# EAGLE board led_strip_panel (EAGLE 5.06)
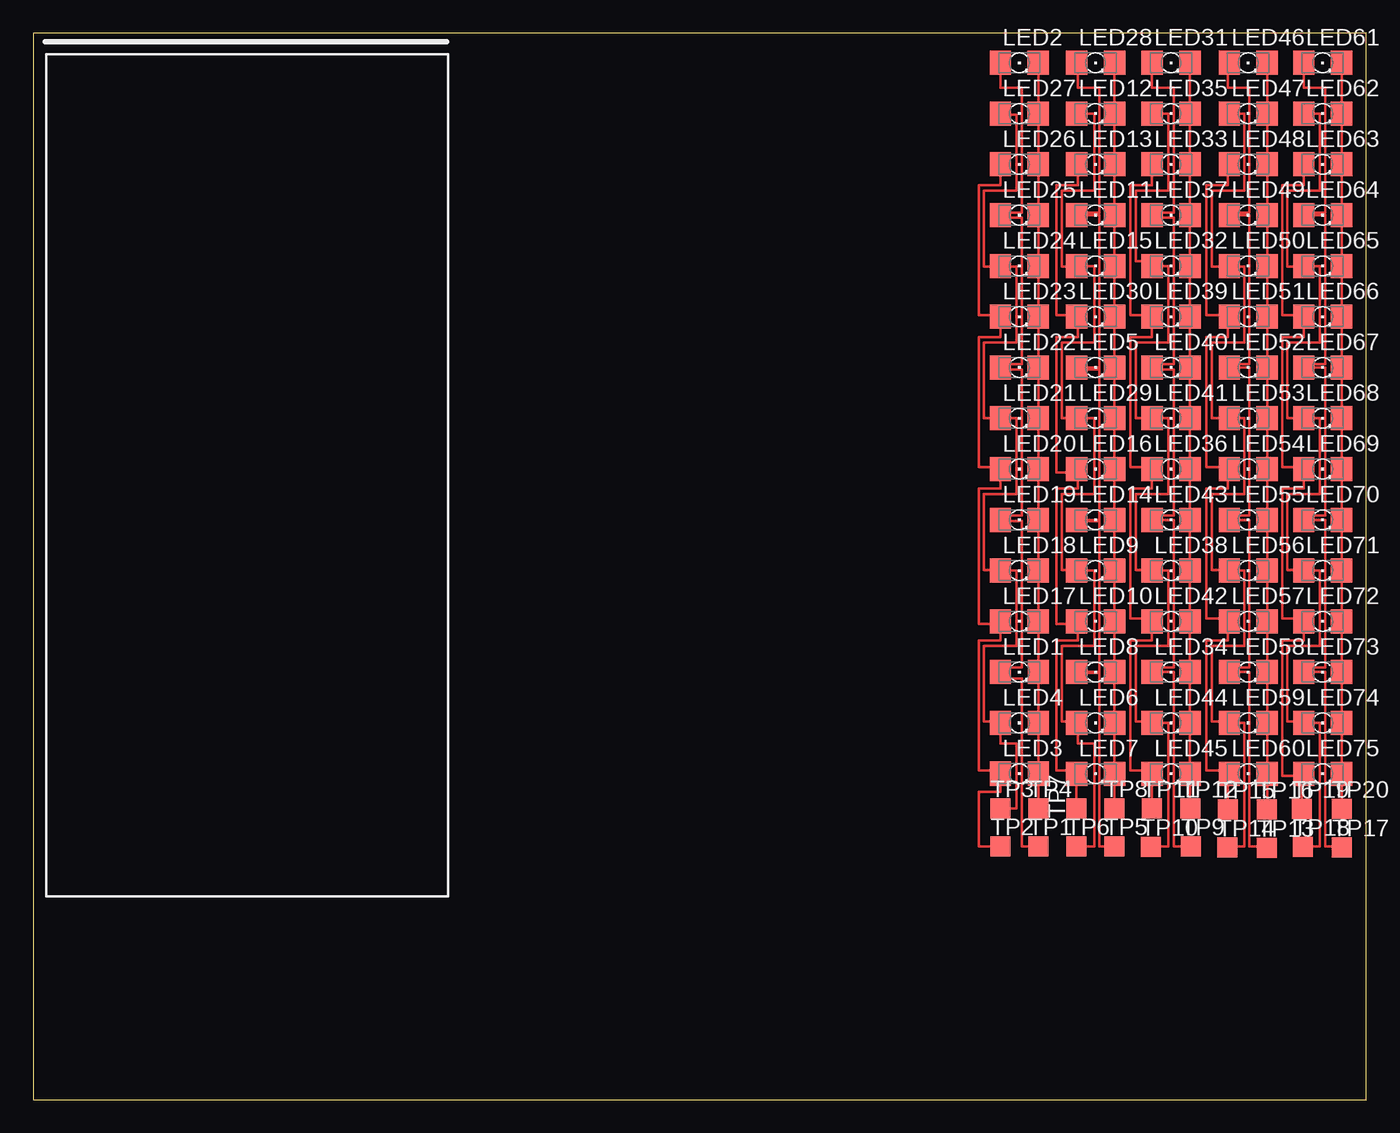
[diagram p0: board, top side]

Size 100 x 80 mm. Coordinates in mm from the lower left corner, seen from the top.
Outline: 0,0 100,0 100,80 0,80 0,0
Copper layers (1*16): Top 0.035mm / dielectric 1.5mm / Bottom 0.035mm
Design rules "default *": minimum track width 8mil, minimum drill 24mil, track to track 8mil, track to pad 8mil, pad to pad 8mil, via to via 8mil, smd to smd 8mil, copper to edge 40mil, drill to drill 8mil, minimum pad ring 10mil, minimum via ring 8mil, stop-mask expansion 4mil, vias tented up to drill 0mil, thermal gap 10mil

## Footprints (pad centres in the part's own frame; a part is rotated, then mirrored left to right if it is on the bottom)
1206 = smd 1.6 x 1.803: A -1.422,0; C 1.422,0
TP15SQ = smd 1.5 x 1.5: TP 0,0

## Placement (x,y rotation side)
LED1  1206  [1206]  73.98,32.07 0 top
LED2  1206  [1206]  73.98,77.79 0 top
LED3  1206  [1206]  73.98,24.45 0 top
LED4  1206  [1206]  73.98,28.26 0 top
LED5  1206  [1206]  79.69,54.93 0 top
LED6  1206  [1206]  79.69,28.26 0 top
LED7  1206  [1206]  79.69,24.45 0 top
LED8  1206  [1206]  79.69,32.07 0 top
LED9  1206  [1206]  79.69,39.69 0 top
LED10  1206  [1206]  79.69,35.88 0 top
LED11  1206  [1206]  79.69,66.36 0 top
LED12  1206  [1206]  79.69,73.98 0 top
LED13  1206  [1206]  79.69,70.17 0 top
LED14  1206  [1206]  79.69,43.5 0 top
LED15  1206  [1206]  79.69,62.55 0 top
LED16  1206  [1206]  79.69,47.31 0 top
LED17  1206  [1206]  73.98,35.88 0 top
LED18  1206  [1206]  73.98,39.69 0 top
LED19  1206  [1206]  73.98,43.5 0 top
LED20  1206  [1206]  73.98,47.31 0 top
LED21  1206  [1206]  73.98,51.12 0 top
LED22  1206  [1206]  73.98,54.93 0 top
LED23  1206  [1206]  73.98,58.74 0 top
LED24  1206  [1206]  73.98,62.55 0 top
LED25  1206  [1206]  73.98,66.36 0 top
LED26  1206  [1206]  73.98,70.17 0 top
LED27  1206  [1206]  73.98,73.98 0 top
LED28  1206  [1206]  79.69,77.79 0 top
LED29  1206  [1206]  79.69,51.12 0 top
LED30  1206  [1206]  79.69,58.74 0 top
LED31  1206  [1206]  85.36,77.79 0 top
LED32  1206  [1206]  85.36,62.55 0 top
LED33  1206  [1206]  85.36,70.17 0 top
LED34  1206  [1206]  85.36,32.07 0 top
LED35  1206  [1206]  85.36,73.98 0 top
LED36  1206  [1206]  85.36,47.31 0 top
LED37  1206  [1206]  85.36,66.36 0 top
LED38  1206  [1206]  85.36,39.69 0 top
LED39  1206  [1206]  85.36,58.74 0 top
LED40  1206  [1206]  85.36,54.93 0 top
LED41  1206  [1206]  85.36,51.12 0 top
LED42  1206  [1206]  85.36,35.88 0 top
LED43  1206  [1206]  85.36,43.5 0 top
LED44  1206  [1206]  85.36,28.26 0 top
LED45  1206  [1206]  85.36,24.45 0 top
LED46  1206  [1206]  91.15,77.79 0 top
LED47  1206  [1206]  91.15,73.98 0 top
LED48  1206  [1206]  91.15,70.17 0 top
LED49  1206  [1206]  91.15,66.36 0 top
LED50  1206  [1206]  91.15,62.55 0 top
LED51  1206  [1206]  91.15,58.74 0 top
LED52  1206  [1206]  91.15,54.93 0 top
LED53  1206  [1206]  91.15,51.12 0 top
LED54  1206  [1206]  91.15,47.31 0 top
LED55  1206  [1206]  91.15,43.5 0 top
LED56  1206  [1206]  91.15,39.69 0 top
LED57  1206  [1206]  91.15,35.88 0 top
LED58  1206  [1206]  91.15,32.07 0 top
LED59  1206  [1206]  91.15,28.26 0 top
LED60  1206  [1206]  91.15,24.45 0 top
LED61  1206  [1206]  96.74,77.79 0 top
LED62  1206  [1206]  96.74,73.98 0 top
LED63  1206  [1206]  96.74,70.17 0 top
LED64  1206  [1206]  96.74,66.36 0 top
LED65  1206  [1206]  96.74,62.55 0 top
LED66  1206  [1206]  96.74,58.74 0 top
LED67  1206  [1206]  96.74,54.93 0 top
LED68  1206  [1206]  96.74,51.12 0 top
LED69  1206  [1206]  96.74,47.31 0 top
LED70  1206  [1206]  96.74,43.5 0 top
LED71  1206  [1206]  96.74,39.69 0 top
LED72  1206  [1206]  96.74,35.88 0 top
LED73  1206  [1206]  96.74,32.07 0 top
LED74  1206  [1206]  96.74,28.26 0 top
LED75  1206  [1206]  96.74,24.45 0 top
TP1  1.1  [TP15SQ]  75.4,19.01 0 top
TP2  1.2  [TP15SQ]  72.56,19.01 0 top
TP3  1.3  [TP15SQ]  72.56,21.86 0 top
TP4  1.4  [TP15SQ]  75.4,21.86 0 top
TP5  2.1  [TP15SQ]  81.09,19.01 0 top
TP6  2.2  [TP15SQ]  78.24,19.01 0 top
TP7  2.3  [TP15SQ]  78.24,21.86 90 top
TP8  2.4  [TP15SQ]  81.09,21.86 0 top
TP9  3.1  [TP15SQ]  86.86,18.99 0 top
TP10  3.2  [TP15SQ]  83.83,18.96 0 top
TP11  3.3  [TP15SQ]  83.91,21.83 0 top
TP12  3.4  [TP15SQ]  86.8,21.83 0 top
TP13  4.1  [TP15SQ]  92.56,18.88 0 top
TP14  4.2  [TP15SQ]  89.59,18.91 0 top
TP15  4.3  [TP15SQ]  89.64,21.76 0 top
TP16  4.4  [TP15SQ]  92.53,21.76 0 top
TP17  4.1  [TP15SQ]  98.18,18.92 0 top
TP18  4.2  [TP15SQ]  95.24,18.96 0 top
TP19  4.3  [TP15SQ]  95.17,21.81 0 top
TP20  4.4  [TP15SQ]  98.16,21.81 0 top

## Library data of the parts
LED1-LED75 = led
TP1-TP20 = testpad

## Nets
LED1.1: LED1.A LED2.A LED19.A LED22.A LED25.A TP1.TP
LED1.2: LED3.A LED17.A LED20.A LED23.A LED26.A TP2.TP
LED1.3: LED4.A LED18.A LED21.A LED24.A LED27.A TP3.TP
LED1.4: LED1.C LED2.C LED3.C LED4.C LED17.C LED18.C LED19.C LED20.C LED21.C LED22.C LED23.C LED24.C LED25.C LED26.C LED27.C TP4.TP
LED2.1: LED5.A LED8.A LED11.A LED14.A LED28.A TP5.TP
LED2.2: LED6.A LED9.A LED12.A LED15.A LED29.A TP6.TP
LED2.3: LED7.A LED10.A LED13.A LED16.A LED30.A TP7.TP
LED2.4: LED5.C LED6.C LED7.C LED8.C LED9.C LED10.C LED11.C LED12.C LED13.C LED14.C LED15.C LED16.C LED28.C LED29.C LED30.C TP8.TP
LED3.1: LED31.A LED34.A LED37.A LED40.A LED43.A TP9.TP
LED3.2: LED32.A LED35.A LED38.A LED41.A LED44.A TP10.TP
LED3.3: LED33.A LED36.A LED39.A LED42.A LED45.A TP11.TP
LED3.4: LED31.C LED32.C LED33.C LED34.C LED35.C LED36.C LED37.C LED38.C LED39.C LED40.C LED41.C LED42.C LED43.C LED44.C LED45.C TP12.TP
LED4.1: LED46.A LED49.A LED52.A LED55.A LED58.A TP13.TP
LED4.2: LED47.A LED50.A LED53.A LED56.A LED59.A TP14.TP
LED4.3: LED48.A LED51.A LED54.A LED57.A LED60.A TP15.TP
LED4.4: LED46.C LED47.C LED48.C LED49.C LED50.C LED51.C LED52.C LED53.C LED54.C LED55.C LED56.C LED57.C LED58.C LED59.C LED60.C TP16.TP
LED5.1: LED61.A LED64.A LED67.A LED70.A LED73.A TP17.TP
LED5.2: LED62.A LED65.A LED68.A LED71.A LED74.A TP18.TP
LED5.3: LED63.A LED66.A LED69.A LED72.A LED75.A TP19.TP
LED5.4: LED61.C LED62.C LED63.C LED64.C LED65.C LED66.C LED67.C LED68.C LED69.C LED70.C LED71.C LED72.C LED73.C LED74.C LED75.C TP20.TP

## Tracks (layer width: path | path; a pad name or v marks a point on that pad's centre or on a via)
LED1.1
  Top 0.203: LED2.A | LED2.A 72.56,75.91 74.18,75.91 74.18,66.56 72.56,66.56 LED25.A | LED25.A | LED25.A 72.56,66.15 74.18,66.15 74.18,55.18 72.56,55.18 LED22.A | LED22.A | LED22.A 72.56,54.77 74.18,54.77 74.18,43.8 72.56,43.8 | 72.56,43.8 LED19.A | 72.56,43.8 72.96,43.8 72.96,43.4 74.18,43.4 74.18,32.42 72.56,32.42 | 72.56,32.42 LED1.A | 72.56,32.42 72.96,32.42 72.96,31.61 74.18,31.61 74.18,19.01 TP1.TP
LED1.2
  Top 0.203: LED26.A | LED26.A 72.56,68.59 70.93,68.59 70.93,58.84 72.56,58.84 LED23.A | LED23.A | LED23.A 72.56,57.21 70.93,57.21 70.93,47.46 72.56,47.46 LED20.A | LED20.A | LED20.A 72.56,45.83 70.93,45.83 70.93,35.67 | 70.93,35.67 72.56,35.67 | 72.56,35.67 LED17.A | 72.56,35.67 70.93,35.67 | 72.56,35.67 72.56,34.45 70.93,34.45 70.93,24.7 | 70.93,24.7 72.56,24.7 LED3.A | 70.93,24.7 72.56,24.7 72.56,23.08 70.93,23.08 70.93,19.01 TP2.TP
LED1.3
  Top 0.203: LED27.A | LED27.A 72.56,73.88 73.77,73.88 73.77,68.19 71.34,68.19 71.34,62.5 72.56,62.5 | 72.56,62.5 | 72.56,62.5 LED24.A | LED24.A | 72.56,62.5 LED24.A | 72.56,62.5 73.77,62.5 73.77,56.81 71.34,56.81 71.34,51.12 LED21.A | LED21.A | LED21.A 73.77,51.12 73.77,45.43 71.34,45.43 71.34,39.74 72.56,39.74 LED18.A 73.77,39.69 73.77,34.05 71.34,34.05 71.34,28.36 | 71.34,28.36 72.56,28.36 LED4.A | 71.34,28.36 72.56,28.36 72.56,26.73 73.77,26.73 73.77,21.86 TP3.TP
LED1.4
  Top 0.203: LED2.C LED27.C LED26.C LED25.C LED24.C LED23.C LED22.C LED21.C LED20.C LED19.C LED18.C LED17.C LED1.C LED4.C LED3.C | LED3.C 75.56,24.45 | TP4.TP LED3.C
LED2.1
  Top 0.203: LED28.A 78.37,77.79 78.37,75.91 80,75.91 80,66.56 78.27,66.56 LED11.A 80,66.36 80,54.77 78.27,54.77 LED5.A 80,54.93 80,43.4 78.27,43.4 LED14.A 80,43.5 80,32.02 78.27,32.02 LED8.A 80,32.07 80,19.01 TP5.TP
LED2.2
  Top 0.203: LED12.A 79.59,73.98 79.59,68.19 77.15,68.19 77.15,62.5 78.27,62.5 LED15.A 79.59,62.55 79.59,56.81 77.15,56.81 77.15,51.12 LED29.A 79.59,51.12 79.59,45.43 77.15,45.43 77.15,39.74 78.27,39.74 LED9.A 79.59,39.69 79.59,34.05 77.15,34.05 77.15,28.36 78.27,28.36 LED6.A 78.37,28.26 78.37,26.73 79.59,26.73 79.59,19.01 TP6.TP
LED2.3
  Top 0.203: LED13.A 78.37,70.17 78.37,68.59 76.75,68.59 76.75,58.84 78.27,58.84 LED30.A 78.37,58.74 78.37,57.21 76.75,57.21 76.75,47.05 78.27,47.05 LED16.A 78.37,47.31 78.37,45.83 76.75,45.83 76.75,35.67 78.27,35.67 LED10.A 78.37,35.88 78.37,34.45 76.75,34.45 76.75,24.7 78.27,24.7 LED7.A 78.25,24.45 TP7.TP
LED2.4
  Top 0.203: LED28.C LED12.C LED13.C LED11.C LED15.C LED30.C LED5.C LED29.C LED16.C LED14.C LED9.C LED10.C LED8.C LED6.C LED7.C 81.11,21.86 TP8.TP
LED3.1
  Top 0.203: LED31.A 83.93,75.91 85.56,75.91 85.56,66.56 83.94,66.56 LED37.A 83.94,66.15 85.56,66.15 85.56,55.18 83.94,55.18 LED40.A 83.94,54.77 85.56,54.77 85.56,43.8 83.94,43.8 LED43.A 85.56,43.5 85.56,32.42 83.94,32.42 LED34.A 85.56,32.07 85.56,19.01 86.86,19.01 TP9.TP
LED3.2
  Top 0.203: LED35.A 85.15,73.98 85.15,68.19 82.72,68.19 82.72,62.9 83.94,62.9 LED32.A 85.15,62.55 85.15,56.81 82.72,56.81 82.72,51.12 LED41.A 85.15,51.12 85.15,45.43 82.72,45.43 82.72,39.74 83.94,39.74 LED38.A 85.15,39.69 85.15,34.05 82.72,34.05 82.72,28.36 83.94,28.36 LED44.A 85.15,28.26 85.15,19.01 83.83,19.01 TP10.TP
LED3.3
  Top 0.203: LED33.A 83.93,68.59 82.31,68.59 82.31,58.84 83.94,58.84 LED39.A 83.93,57.21 82.31,57.21 82.31,47.46 83.94,47.46 LED36.A 83.93,45.83 82.31,45.83 82.31,36.08 83.94,36.08 LED42.A 83.93,34.45 82.31,34.45 82.31,24.7 83.94,24.7 LED45.A 83.91,24.45 TP11.TP
LED3.4
  Top 0.203: LED31.C LED35.C LED33.C LED37.C LED32.C LED39.C LED40.C LED41.C LED36.C LED43.C LED38.C LED42.C LED34.C LED44.C LED45.C 86.78,21.83 TP12.TP
LED4.1
  Top 0.203: LED46.A 89.62,77.79 89.62,75.91 91.25,75.91 91.25,66.56 89.73,66.56 LED49.A 91.25,66.36 91.25,55.18 89.73,55.18 LED52.A 91.25,54.93 91.25,43.8 89.73,43.8 LED55.A 91.25,43.5 91.25,32.42 89.73,32.42 LED58.A 91.25,32.07 91.25,19.01 92.56,19.01 TP13.TP
LED4.2
  Top 0.203: LED47.A 90.84,73.98 90.84,68.19 88.41,68.19 88.41,62.5 89.73,62.5 | 89.73,62.5 LED50.A | 89.73,62.5 90.84,62.5 90.84,56.81 88.41,56.81 88.41,51.12 LED53.A 90.84,51.12 90.84,45.43 88.41,45.43 88.41,39.74 89.73,39.74 LED56.A 90.84,39.69 90.84,34.05 88.41,34.05 88.41,28.36 89.73,28.36 LED59.A 90.84,28.26 90.84,19.01 89.59,19.01 TP14.TP
LED4.3
  Top 0.203: LED48.A 89.62,70.17 89.62,68.59 88,68.59 88,58.84 89.73,58.84 LED51.A 89.62,58.74 89.62,57.21 88,57.21 88,47.46 89.73,47.46 LED54.A 89.62,47.31 89.62,45.83 88,45.83 88,36.08 89.73,36.08 LED57.A 89.62,35.88 89.62,34.45 88,34.45 88,24.7 89.73,24.7 LED60.A 89.64,24.45 TP15.TP
LED4.4
  Top 0.203: LED46.C LED47.C LED48.C LED49.C LED50.C LED51.C LED52.C LED53.C LED54.C LED55.C LED56.C LED57.C LED58.C LED59.C LED60.C 92.57,21.75 TP16.TP
LED5.1
  Top 0.203: LED61.A | LED61.A 95.31,75.91 96.94,75.91 96.94,66.56 95.31,66.56 LED64.A 96.94,66.36 96.94,55.18 95.31,55.18 LED67.A 96.94,54.93 96.94,43.8 95.31,43.8 LED70.A 96.94,43.5 96.94,32.42 95.31,32.42 LED73.A 96.94,32.07 96.94,19.01 98.18,19.01 TP17.TP
LED5.2
  Top 0.203: LED62.A 96.53,73.98 96.53,68.19 94.09,68.19 94.09,62.5 95.31,62.5 LED65.A 96.53,62.55 96.53,56.81 94.09,56.81 94.09,51.12 LED68.A 96.53,51.12 96.53,45.43 94.09,45.43 94.09,39.74 95.31,39.74 LED71.A 96.53,39.69 96.53,34.05 94.09,34.05 94.09,28.36 95.31,28.36 LED74.A 96.53,28.26 96.53,19.01 95.24,19.01 TP18.TP
LED5.3
  Top 0.203: LED63.A | LED63.A 95.31,68.59 93.69,68.59 93.69,58.84 95.31,58.84 LED66.A | LED66.A | LED66.A 95.31,57.21 93.69,57.21 93.69,47.46 95.31,47.46 LED69.A | LED69.A | LED69.A 95.31,45.83 93.69,45.83 93.69,36.08 95.31,36.08 LED72.A | LED72.A | LED72.A 95.31,34.45 93.69,34.45 93.69,24.3 95.31,24.3 LED75.A 95.17,24.45 TP19.TP
LED5.4
  Top 0.203: LED61.C LED62.C LED63.C LED64.C LED65.C LED66.C LED67.C LED68.C LED69.C LED70.C LED71.C LED72.C LED73.C LED74.C LED75.C | LED75.C | TP20.TP LED75.C